# EAGLE board ant_traffic_pcb v15 (EAGLE 9.7.0)
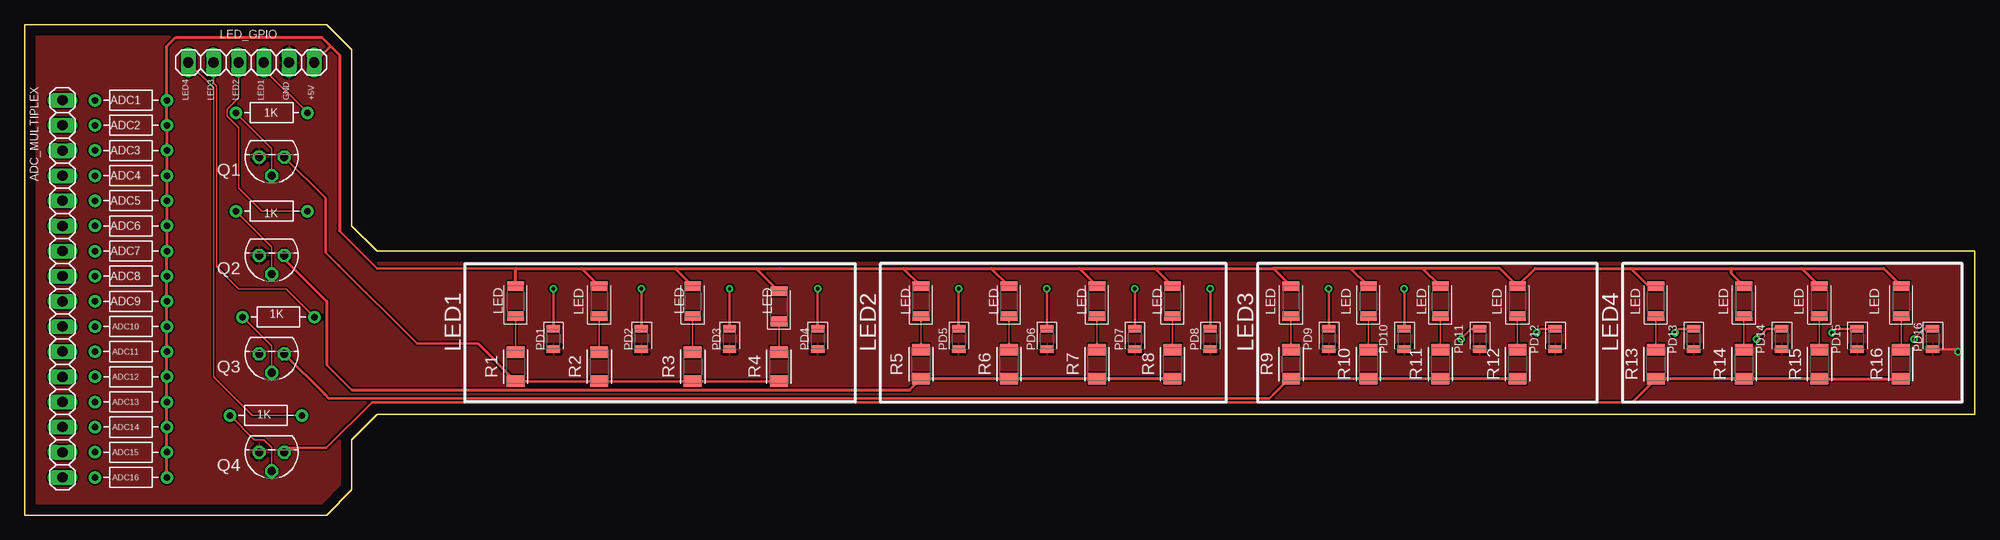
[diagram p0: board, top side]
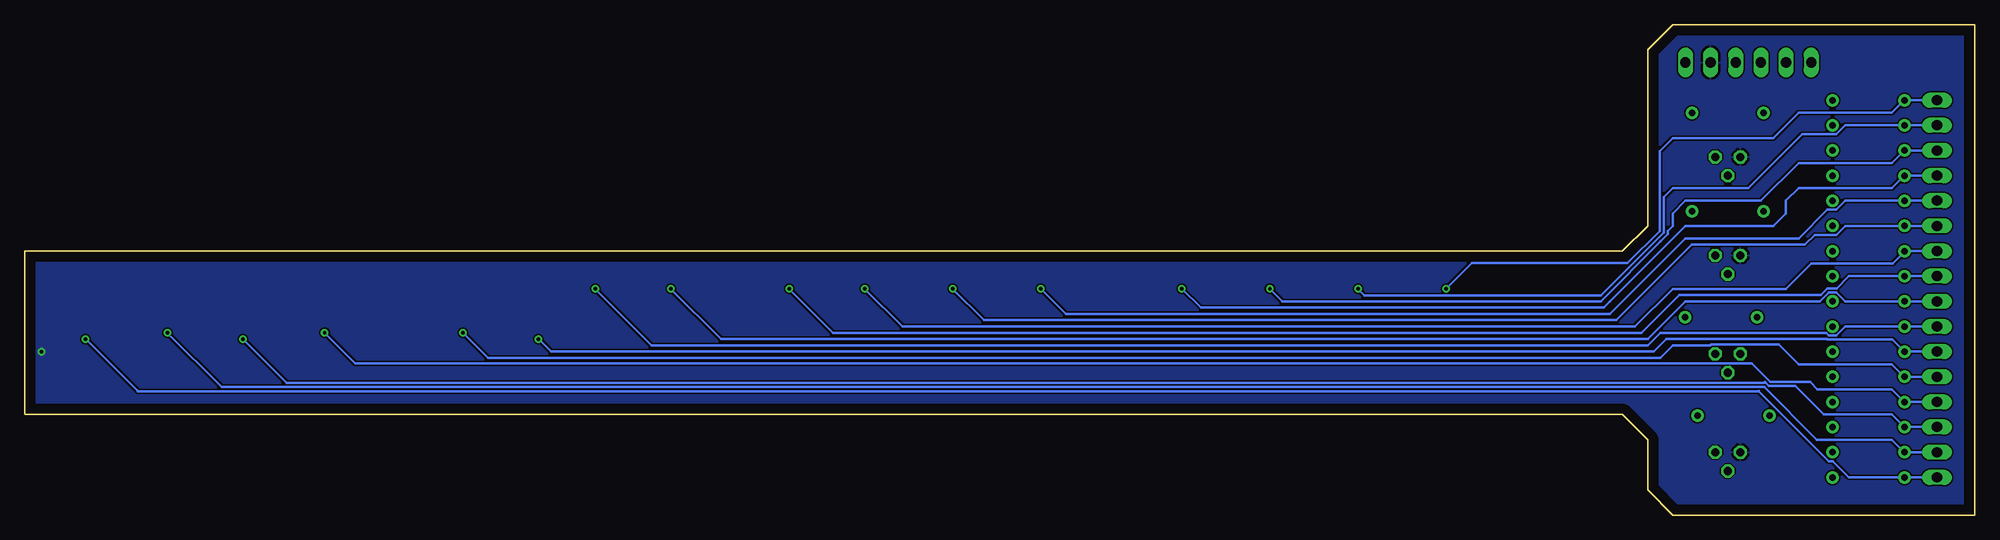
[diagram p1: board, bottom side, seen from below]

Size 196.85 x 49.53 mm. Coordinates in mm from the lower left corner, seen from the top.
Outline: 0,0 0,49.53 30.48,49.53 33.02,46.99 33.02,29.21 35.56,26.67 196.85,26.67 196.85,10.16 35.56,10.16 33.02,7.62 33.02,2.54 30.48,0 0,0
Copper layers (1*16): Top 0.035mm / dielectric 1.5mm / Bottom 0.035mm
Design rules "default": minimum track width 6mil, minimum drill 0.35mm, track to track 6mil, track to pad 6mil, pad to pad 6mil, via to via 6mil, smd to smd 6mil, copper to edge 40mil, drill to drill 6mil, minimum pad ring 10mil, minimum via ring 8mil, stop-mask expansion 4mil, vias tented up to drill 0mil, thermal gap 10mil

## Footprints (pad centres in the part's own frame; a part is rotated, then mirrored left to right if it is on the bottom)
1X16 = drill 1.016 long: 1 -19.05,0; 2 -16.51,0; 3 -13.97,0; 4 -11.43,0; 5 -8.89,0; 6 -6.35,0; 7 -3.81,0; 8 -1.27,0; 9 1.27,0; 10 3.81,0; 11 6.35,0; 12 8.89,0; 13 11.43,0; 14 13.97,0; 15 16.51,0; 16 19.05,0
1X06 = drill 1.016 long: 1 -6.35,0; 2 -3.81,0; 3 -1.27,0; 4 1.27,0; 5 3.81,0; 6 6.35,0
TO92 = drill 0.813 octagon: 1 1.27,0; 2 0,1.905; 3 -1.27,0
RESC3216X70 = smd 1.165 x 1.815: 1 -1.475,0; 2 1.475,0
RESAD724W46L381D178B = drill 0.66 pad 1.26: 1 -3.62,0; 2 3.62,0
LEDC3216X75N = smd 0.962 x 1.712: A 1.525,0; C -1.525,0
LEDC2012X110N = smd 0.762 x 1.362: A 1.025,0; C -1.025,0

## Placement (x,y rotation side)
ADC_MULTIPLEX  PINHD-1X16  [1X16]  3.81,22.86 270 top
LED_GPIO  PINHD-1X6  [1X06]  22.86,45.72 180 top
Q1  2N3904  [TO92]  24.92,36.18 180 top
Q2  2N3904  [TO92]  24.92,26.23 180 top
Q3  2N3904  [TO92]  24.92,16.29 180 top
Q4  2N3904  [TO92]  24.92,6.35 180 top
R1  [RESC3216X70]  49.56,14.99 90 top
R2  [RESC3216X70]  58,14.99 90 top
R3  [RESC3216X70]  67.44,14.99 90 top
R4  [RESC3216X70]  76.13,14.99 90 top
R5  [RESC3216X70]  90.47,15.24 90 top
R6  [RESC3216X70]  99.36,15.24 90 top
R7  [RESC3216X70]  108.25,15.24 90 top
R8  [RESC3216X70]  115.87,15.24 90 top
R9  [RESC3216X70]  127.84,15.24 90 top
R10  [RESC3216X70]  135.64,15.24 90 top
R11  [RESC3216X70]  142.9,15.24 90 top
R12  [RESC3216X70]  150.7,15.24 90 top
R13  [RESC3216X70]  164.67,15.24 90 top
R14  [RESC3216X70]  173.56,15.24 90 top
R15  [RESC3216X70]  181.18,15.24 90 top
R16  [RESC3216X70]  189.4,15.24 90 top
R17  [RESAD724W46L381D178B]  24.92,40.64 0 top
R18  [RESAD724W46L381D178B]  24.92,30.7 0 top
R19  [RESAD724W46L381D178B]  25.61,19.99 0 top
R20  [RESAD724W46L381D178B]  24.34,10.05 0 top
R21  [RESAD724W46L381D178B]  10.71,41.91 0 top
R22  [RESAD724W46L381D178B]  10.71,39.37 0 top
R23  [RESAD724W46L381D178B]  10.71,36.83 0 top
R24  [RESAD724W46L381D178B]  10.71,34.28 0 top
R25  [RESAD724W46L381D178B]  10.71,31.75 0 top
R26  [RESAD724W46L381D178B]  10.71,29.21 0 top
R27  [RESAD724W46L381D178B]  10.71,26.67 0 top
R28  [RESAD724W46L381D178B]  10.71,24.13 0 top
R29  [RESAD724W46L381D178B]  10.71,21.59 0 top
R30  [RESAD724W46L381D178B]  10.71,19.05 0 top
R31  [RESAD724W46L381D178B]  10.71,16.51 0 top
R32  [RESAD724W46L381D178B]  10.71,13.97 0 top
R33  [RESAD724W46L381D178B]  10.71,11.43 0 top
R34  [RESAD724W46L381D178B]  10.71,8.89 0 top
R35  [RESAD724W46L381D178B]  10.71,6.35 0 top
R36  [RESAD724W46L381D178B]  10.71,3.81 0 top
U$1  CHIP-FLAT-B_1206  [LEDC3216X75N]  49.56,21.59 90 top
U$2  CHIP-FLAT-B_1206  [LEDC3216X75N]  58,21.59 90 top
U$3  CHIP-FLAT-B_1206  [LEDC3216X75N]  67.44,21.59 90 top
U$4  CHIP-FLAT-B_1206  [LEDC3216X75N]  76.13,21.08 90 top
U$5  CHIP-FLAT-B_1206  [LEDC3216X75N]  90.47,21.59 90 top
U$6  CHIP-FLAT-B_1206  [LEDC3216X75N]  99.36,21.59 90 top
U$7  CHIP-FLAT-B_1206  [LEDC3216X75N]  108.25,21.59 90 top
U$8  CHIP-FLAT-B_1206  [LEDC3216X75N]  115.87,21.59 90 top
U$9  CHIP-FLAT-B_1206  [LEDC3216X75N]  127.84,21.59 90 top
U$10  CHIP-FLAT-B_1206  [LEDC3216X75N]  135.64,21.59 90 top
U$11  CHIP-FLAT-B_1206  [LEDC3216X75N]  142.9,21.59 90 top
U$12  CHIP-FLAT-B_1206  [LEDC3216X75N]  150.7,21.59 90 top
U$13  CHIP-FLAT-B_1206  [LEDC3216X75N]  164.67,21.59 90 top
U$14  CHIP-FLAT-B_1206  [LEDC3216X75N]  173.56,21.59 90 top
U$15  CHIP-FLAT-B_1206  [LEDC3216X75N]  181.18,21.59 90 top
U$16  CHIP-FLAT-B_1206  [LEDC3216X75N]  189.45,21.59 90 top
U$17  CHIP-FLAT-R_0805  [LEDC2012X110N]  53.37,17.78 270 top
U$18  CHIP-FLAT-R_0805  [LEDC2012X110N]  62.26,17.78 270 top
U$19  CHIP-FLAT-R_0805  [LEDC2012X110N]  71.15,17.78 270 top
U$20  CHIP-FLAT-R_0805  [LEDC2012X110N]  80.04,17.78 270 top
U$21  CHIP-FLAT-R_0805  [LEDC2012X110N]  94.28,17.78 270 top
U$22  CHIP-FLAT-R_0805  [LEDC2012X110N]  103.17,17.78 270 top
U$23  CHIP-FLAT-R_0805  [LEDC2012X110N]  112.06,17.78 270 top
U$24  CHIP-FLAT-R_0805  [LEDC2012X110N]  119.68,17.78 270 top
U$25  CHIP-FLAT-R_0805  [LEDC2012X110N]  131.65,17.78 270 top
U$26  CHIP-FLAT-R_0805  [LEDC2012X110N]  139.27,17.78 270 top
U$27  CHIP-FLAT-R_0805  [LEDC2012X110N]  146.89,17.78 270 top
U$28  CHIP-FLAT-R_0805  [LEDC2012X110N]  154.51,17.78 270 top
U$29  CHIP-FLAT-R_0805  [LEDC2012X110N]  168.48,17.78 270 top
U$30  CHIP-FLAT-R_0805  [LEDC2012X110N]  177.37,17.78 270 top
U$31  CHIP-FLAT-R_0805  [LEDC2012X110N]  184.99,17.78 270 top
U$32  CHIP-FLAT-R_0805  [LEDC2012X110N]  192.61,17.78 270 top

## Library data of the parts
ADC_MULTIPLEX LED_GPIO = Connector; CATEGORY: CONNECTOR; SUB-CATEGORY: PIN-HEADER
Q1-Q4 = Transistor; CATEGORY: Transistor; SUB-CATEGORY: BJT; TYPE: NPN
R1-R36 = Resistor; CATEGORY: Resistor; SUB-CATEGORY: Fixed
U$1-U$16 = LED; CATEGORY: LED; COLOR: BLUE; DESCRIPTION: CHIP LED FLAT; SUB-CATEGORY: CHIP; TYPE: FLAT_TOP
U$17-U$32 = LED; CATEGORY: LED; COLOR: RED; DESCRIPTION: CHIP LED FLAT; SUB-CATEGORY: CHIP; TYPE: FLAT_TOP

## Nets
+5V: LED_GPIO.1 R21.2 R22.2 R23.2 R24.2 R25.2 R26.2 R27.2 R28.2 R29.2 R30.2 R31.2 R32.2 R33.2 R34.2 R35.2 R36.2 U$1.A U$2.A U$3.A U$4.A U$5.A U$6.A U$7.A U$8.A U$9.A U$10.A U$11.A U$12.A U$13.A U$14.A U$15.A U$16.A
ADC1: ADC_MULTIPLEX.1 R21.1 U$17.C
ADC2: ADC_MULTIPLEX.2 R22.1 U$18.C
ADC3: ADC_MULTIPLEX.3 R23.1 U$19.C
ADC4: ADC_MULTIPLEX.4 R24.1 U$20.C
ADC5: ADC_MULTIPLEX.5 R25.1 U$21.C
ADC6: ADC_MULTIPLEX.6 R26.1 U$22.C
ADC7: ADC_MULTIPLEX.7 R27.1 U$23.C
ADC8: ADC_MULTIPLEX.8 R28.1 U$24.C
ADC9: ADC_MULTIPLEX.9 R29.1 U$25.C
ADC10: ADC_MULTIPLEX.10 R30.1 U$26.C
ADC11: ADC_MULTIPLEX.11 R31.1 U$27.C
ADC12: ADC_MULTIPLEX.12 R32.1 U$28.C
ADC13: ADC_MULTIPLEX.13 R33.1 U$29.C
ADC14: ADC_MULTIPLEX.14 R34.1 U$30.C
ADC15: ADC_MULTIPLEX.15 R35.1 U$31.C
ADC16: ADC_MULTIPLEX.16 R36.1 U$32.C
GND: LED_GPIO.2 Q1.1 Q2.1 Q4.1 U$17.A U$18.A U$19.A U$20.A U$21.A U$22.A U$23.A U$24.A U$25.A U$26.A U$27.A U$28.A U$29.A U$30.A U$31.A U$32.A
LED1: LED_GPIO.3 R17.2
LED2: LED_GPIO.4 R18.2
LED3: LED_GPIO.5 R19.2
LED4: LED_GPIO.6 R20.2
N$1: R1.2 U$1.C
N$2: R2.2 U$2.C
N$3: R3.2 U$3.C
N$4: R4.2 U$4.C
N$5: Q1.3 R1.1 R2.1 R3.1 R4.1
N$6: Q1.2 R17.1
N$8: Q3.2 R19.1
N$10: R9.2 U$9.C
N$11: R5.2 U$5.C
N$12: R6.2 U$6.C
N$13: R7.2 U$7.C
N$14: R8.2 U$8.C
N$15: Q2.3 R5.1 R6.1 R7.1 R8.1
N$16: R10.2 U$10.C
N$17: R11.2 U$11.C
N$18: R12.2 U$12.C
N$19: Q2.2 R18.1
N$21: Q3.3 R9.1 R10.1 R11.1 R12.1
N$22: R13.2 U$13.C
N$23: R14.2 U$14.C
N$24: R15.2 U$15.C
N$25: R16.2 U$16.C
N$26: Q4.3 R13.1 R14.1 R15.1 R16.1
N$27: Q4.2 R20.1

## Tracks (layer width: path | path; a pad name or v marks a point on that pad's centre or on a via)
+5V
  Top 0.254: 65.64,24.91 76.23,24.91 | 31.77,29.21 31.8,29.18 31.8,28.7 35.6,24.91 49.56,24.91 | 136.02,23.11 U$10.A
  Top 0.305: R36.2 R35.2 R34.2 R33.2 R32.2 R31.2 R30.2 R29.2 R28.2 R27.2 R26.2 R25.2 R24.2 R23.2 R22.2 R21.2 14.33,47.35 15.24,48.26 29.99,48.26 30.87,47.38 | 31.77,28.69 31.77,29.21 31.77,46.47 30.87,47.38 | U$1.A 49.56,24.91 56.2,24.91 | 56.2,24.91 65.64,24.91 | 76.23,24.91 73.83,24.91 U$4.A | 65.64,24.91 88.67,24.91 | 88.67,24.91 97.56,24.91 | 97.56,24.91 106.45,24.91 | 106.45,24.91 114.08,24.91 | 114.08,24.91 126.05,24.91 | 162.13,24.91 172.29,24.91 | 172.29,24.91 179.38,24.91 | U$8.A 114.08,24.91 | U$7.A 106.45,24.91 | U$6.A 97.56,24.91 | U$5.A 88.67,24.91 | U$3.A 65.64,24.91 | U$2.A 56.2,24.91 | U$14.A 172.29,24.39 172.29,24.91 | U$15.A 179.38,24.91 | 179.38,24.91 187.65,24.91 U$16.A | LED_GPIO.1 30.87,47.38 | U$9.A 126.05,24.91 | U$10.A 133.85,24.91 | 133.85,24.91 126.05,24.91 | U$11.A 141.1,24.91 | 141.1,24.91 133.85,24.91 | 141.1,24.91 148.91,24.91 U$12.A 152.5,24.91 162.13,24.91 | U$13.A 163.93,23.11 162.13,24.91
ADC1  (via drill 0.35)
  Top 0.254: U$17.C v53.37,22.86
  Bottom 0.254: ADC_MULTIPLEX.1 R21.1 8.36,40.64 17.78,40.64 20.32,38.1 30.48,38.1 31.8,36.78 31.8,28.7 35.05,25.45 50.78,25.45 v53.37,22.86
ADC2  (via drill 0.35)
  Top 0.254: v62.26,22.86 U$18.C
  Bottom 0.254: ADC_MULTIPLEX.2 R22.1 13.05,39.37 13.96,38.46 17.42,38.46 22.86,33.02 30.48,33.02 31.39,32.11 31.39,28.54 37.73,22.2 61.6,22.2 v62.26,22.86
ADC3  (via drill 0.35)
  Top 0.254: v71.15,22.86 U$19.C
  Bottom 0.254: ADC_MULTIPLEX.3 R23.1 8.36,35.56 17.78,35.56 21.59,31.75 29.21,31.75 30.48,30.48 30.48,29.21 30.99,28.7 30.99,28.37 31.75,27.61 37.77,21.59 69.88,21.59 v71.15,22.86
ADC4  (via drill 0.35)
  Top 0.254: U$20.C v80.04,22.86
  Bottom 0.254: ADC_MULTIPLEX.4 4.57,34.29 4.58,34.28 R24.1 8.35,33.02 17.78,33.02 19.05,31.75 19.05,30.48 20.32,29.21 29.21,29.21 36.83,21.59 37.47,20.95 51.47,20.95 78.14,20.95 v80.04,22.86
ADC5  (via drill 0.35)
  Top 0.254: U$21.C v94.28,22.86
  Bottom 0.254: ADC_MULTIPLEX.5 R25.1 13.05,31.75 13.96,30.84 14.88,30.84 17.78,27.94 29.21,27.94 36.83,20.32 50.83,20.32 91.74,20.32 v94.28,22.86
ADC6  (via drill 0.35)
  Top 0.254: v103.17,22.86 U$22.C
  Bottom 0.254: ADC_MULTIPLEX.6 R26.1 13.05,29.21 13.96,28.3 16.15,28.3 17.14,27.3 28.57,27.3 36.2,19.68 50.2,19.68 100,19.68 v103.17,22.86
ADC7  (via drill 0.35)
  Top 0.254: U$23.C v112.06,22.86
  Bottom 0.254: ADC_MULTIPLEX.7 R27.1 7.09,26.56 8.26,25.4 16.51,25.4 19.05,22.86 30.48,22.86 34.29,19.05 48.29,19.05 108.25,19.05 v112.06,22.86
ADC8  (via drill 0.35)
  Top 0.254: v119.68,22.86 U$24.C
  Bottom 0.254: ADC_MULTIPLEX.8 R28.1 12.7,24.13 13.92,22.91 14.88,22.91 15.56,22.23 29.84,22.23 33.66,18.41 47.66,18.41 115.23,18.41 v119.68,22.86
ADC9  (via drill 0.35)
  Top 0.254: U$25.C v131.65,22.86
  Bottom 0.254: ADC_MULTIPLEX.9 R29.1 13.05,21.59 13.96,22.5 14.71,22.5 15.62,21.59 29.21,21.59 33.02,17.78 126.57,17.78 v131.65,22.86
ADC10  (via drill 0.35)
  Top 0.254: v139.27,22.86 U$26.C
  Bottom 0.254: ADC_MULTIPLEX.10 R30.1 13.05,19.05 13.96,18.14 14.71,18.14 14.98,18.41 31.75,18.41 33.02,17.14 133.56,17.14 v139.27,22.86
ADC11  (via drill 0.35)
  Top 0.254: U$27.C 146.01,18.8 v144.99,17.78
  Bottom 0.254: ADC_MULTIPLEX.11 R31.1 8.32,17.73 14.88,17.73 14.93,17.78 31.11,17.78 32.38,16.51 143.72,16.51 v144.99,17.78
ADC12  (via drill 0.35)
  Top 0.254: v152.6,18.41 153,18.8 U$28.C
  Bottom 0.254: ADC_MULTIPLEX.12 R32.1 8.36,15.24 17.78,15.24 19.77,17.23 26.58,17.23 26.67,17.14 30.48,17.14 31.75,15.88 150.06,15.88 v152.6,18.41
ADC13  (via drill 0.35)
  Top 0.254: U$29.C 166.97,18.8 v166.57,18.41
  Bottom 0.254: ADC_MULTIPLEX.13 R33.1 8.36,12.7 15.88,12.7 16.62,13.45 20.61,13.45 22.49,15.33 163.49,15.33 v166.57,18.41
ADC14  (via drill 0.35)
  Top 0.254: U$30.C 175.85,18.8 v174.83,17.78
  Bottom 0.254: ADC_MULTIPLEX.14 R34.1 8.36,10.16 15.24,10.16 18.12,13.04 20.78,13.04 21.08,13.34 21.19,13.45 21.3,13.34 170.38,13.34 v174.83,17.78
ADC15  (via drill 0.35)
  Top 0.254: v182.45,18.41 182.84,18.8 U$31.C
  Bottom 0.254: ADC_MULTIPLEX.15 R35.1 8.36,7.62 15.94,7.62 21.24,12.93 176.96,12.93 v182.45,18.41
ADC16  (via drill 0.35)
  Top 0.254: U$32.C 191.73,18.8 v190.71,17.78
  Bottom 0.254: ADC_MULTIPLEX.16 R36.1 12.7,3.81 14.33,5.44 14.71,5.44 21.78,12.51 | v190.71,17.78 185.52,12.6 185.45,12.52 185.44,12.51 21.78,12.51 | 21.79,12.52 21.78,12.51
GND  (via drill 0.35)
  Top 0.254: U$32.A 194.91,16.75 v195.15,16.51
  pour Top: 0,49.53 30.48,49.53 33.02,46.99 33.02,29.21 35.56,26.67 196.85,26.67 196.85,10.16 35.56,10.16 33.02,7.62 33.02,2.54 30.48,0 0,0
  pour Bottom: 0,49.53 30.48,49.53 33.02,46.99 33.02,29.21 35.56,26.67 196.85,26.67 196.85,10.16 35.56,10.16 33.02,7.62 33.02,2.54 30.48,0 0,0
LED1
  Top 0.152: R17.2 24.13,45.05 LED_GPIO.3
LED2
  Top 0.152: LED_GPIO.4 21.59,42.14 20.45,41 20.45,40.28 21.59,39.14 21.59,33.02 23.91,30.7 R18.2
LED3
  Top 0.152: R19.2 26.37,22.86 21.59,22.86 19.36,25.09 19.36,43.31 19.05,43.61 LED_GPIO.5
LED4
  Top 0.152: LED_GPIO.6 19.05,43.18 19.05,13.97 22.97,10.05 R20.2
N$1
  Top 0.152: U$1.C R1.2
N$2
  Top 0.152: U$2.C R2.2
N$3
  Top 0.152: U$3.C 67.44,16.61 67.34,16.51 67.39,16.46 R3.2
N$4
  Top 0.152: U$4.C R4.2
N$5
  Top 0.254: Q1.3 30.37,32 30.37,26.55 31.63,25.28 31.75,25.17 39.59,17.32 45.75,17.32 | R1.1 R2.1 R3.1 R4.1
  Top 0.305: R1.1 45.75,17.32
N$6
  Top 0.152: R17.1 24.92,37.02 Q1.2
N$8
  Top 0.152: R19.1 24.92,17.06 Q3.2
N$10
  Top 0.152: U$9.C R9.2
N$11
  Top 0.152: U$5.C R5.2
N$12
  Top 0.152: U$6.C R6.2
N$13
  Top 0.152: U$7.C R7.2
N$14
  Top 0.152: U$8.C R8.2
N$15
  Top 0.254: 30.48,15.16 33.02,12.62
  Top 0.305: R8.1 R7.1 R6.1 R5.1 89.33,12.62 33.02,12.62 | 30.48,15.16 30.48,21.59 26.19,25.88 Q2.3
N$16
  Top 0.152: U$10.C R10.2
N$17
  Top 0.152: U$11.C R11.2
N$18
  Top 0.152: U$12.C R12.2 | R12.2
N$19
  Top 0.152: R18.1 24.92,27.08 Q2.2
N$21
  Top 0.254: 126.15,12.28 125.66,11.79 30.7,11.79 30.32,12.17
  Top 0.305: R12.1 R11.1 135.66,13.77 135.46,13.97 135.46,13.95 R10.1 R9.1 127.64,13.77 126.15,12.28 126.04,12.17 | 30.32,12.17 Q3.3
N$22
  Top 0.152: U$13.C R13.2
N$23
  Top 0.152: U$14.C R14.2
N$24
  Top 0.152: U$15.C R15.2
N$25
  Top 0.152: U$16.C 189.45,16.77 R16.2
N$26
  Top 0.254: 26.67,6.77 30.44,6.77 35.05,11.38 162.28,11.38 162.31,11.4
  Top 0.305: R16.1 R15.1 R14.1 R13.1 162.31,11.4 | Q4.3 26.61,6.77 26.67,6.77 27.27,6.77
N$27
  Top 0.152: R20.1 23.15,7.62 24.13,7.62 24.92,6.83 Q4.2

## Text on the board
tNames: ADC1 | LED4 | LED3 | LED2 | LED1 | GND | +5V | 1K | ADC2 | ADC3 | ADC4 | ADC5 | 1K | ADC6 | ADC7 | ADC8 | ADC9 | LED | LED | LED | LED | LED | LED | LED | LED | LED | LED | LED | LED | LED | 1K | LED | LED | LED | ADC10 | PD1 | PD2 | PD3 | PD4 | PD5 | PD6 | PD7 | PD8 | PD9 | PD10 | PD11 | PD12 | PD13 | PD14 | PD15 | ADC11 | LED1 | LED2 | LED3 | LED4 | PD16 | ADC12 | ADC13 | 1K | ADC14 | ADC15 | ADC16